# EAGLE board 1.1 (EAGLE 9.7.0), part 1 of 2
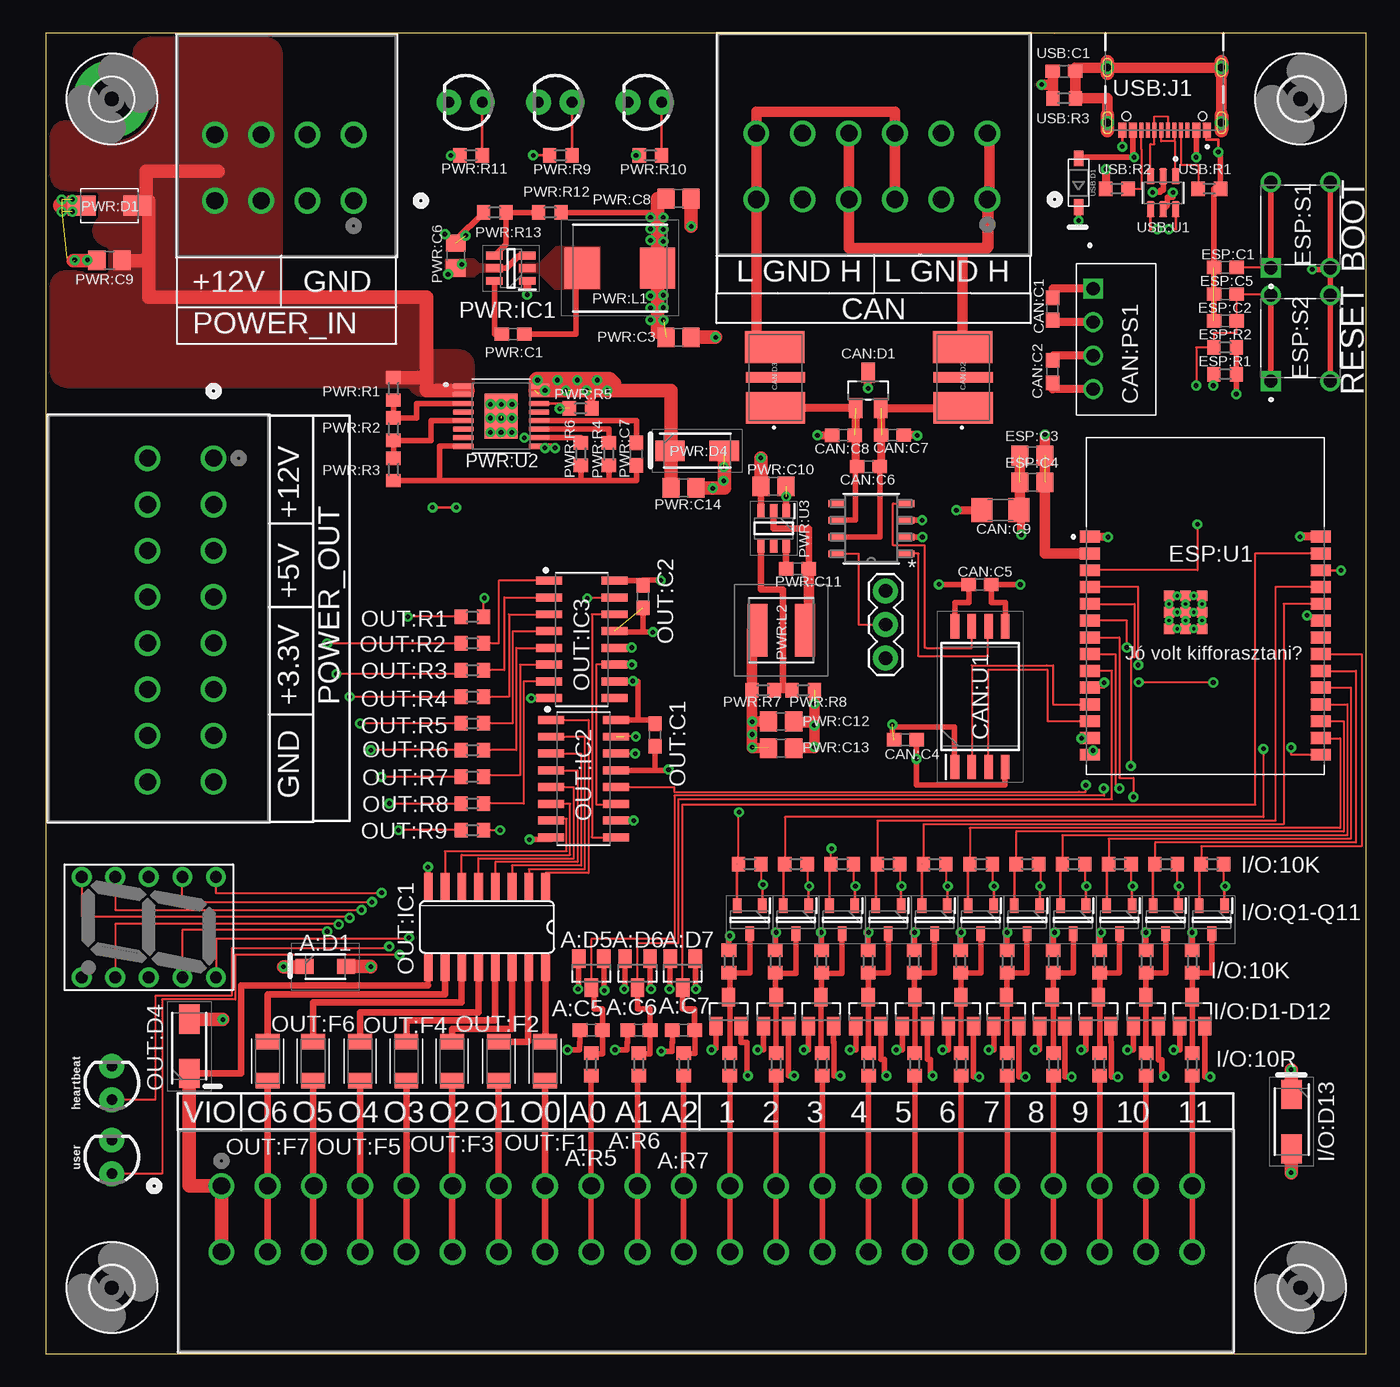
[diagram p0: board, top side]
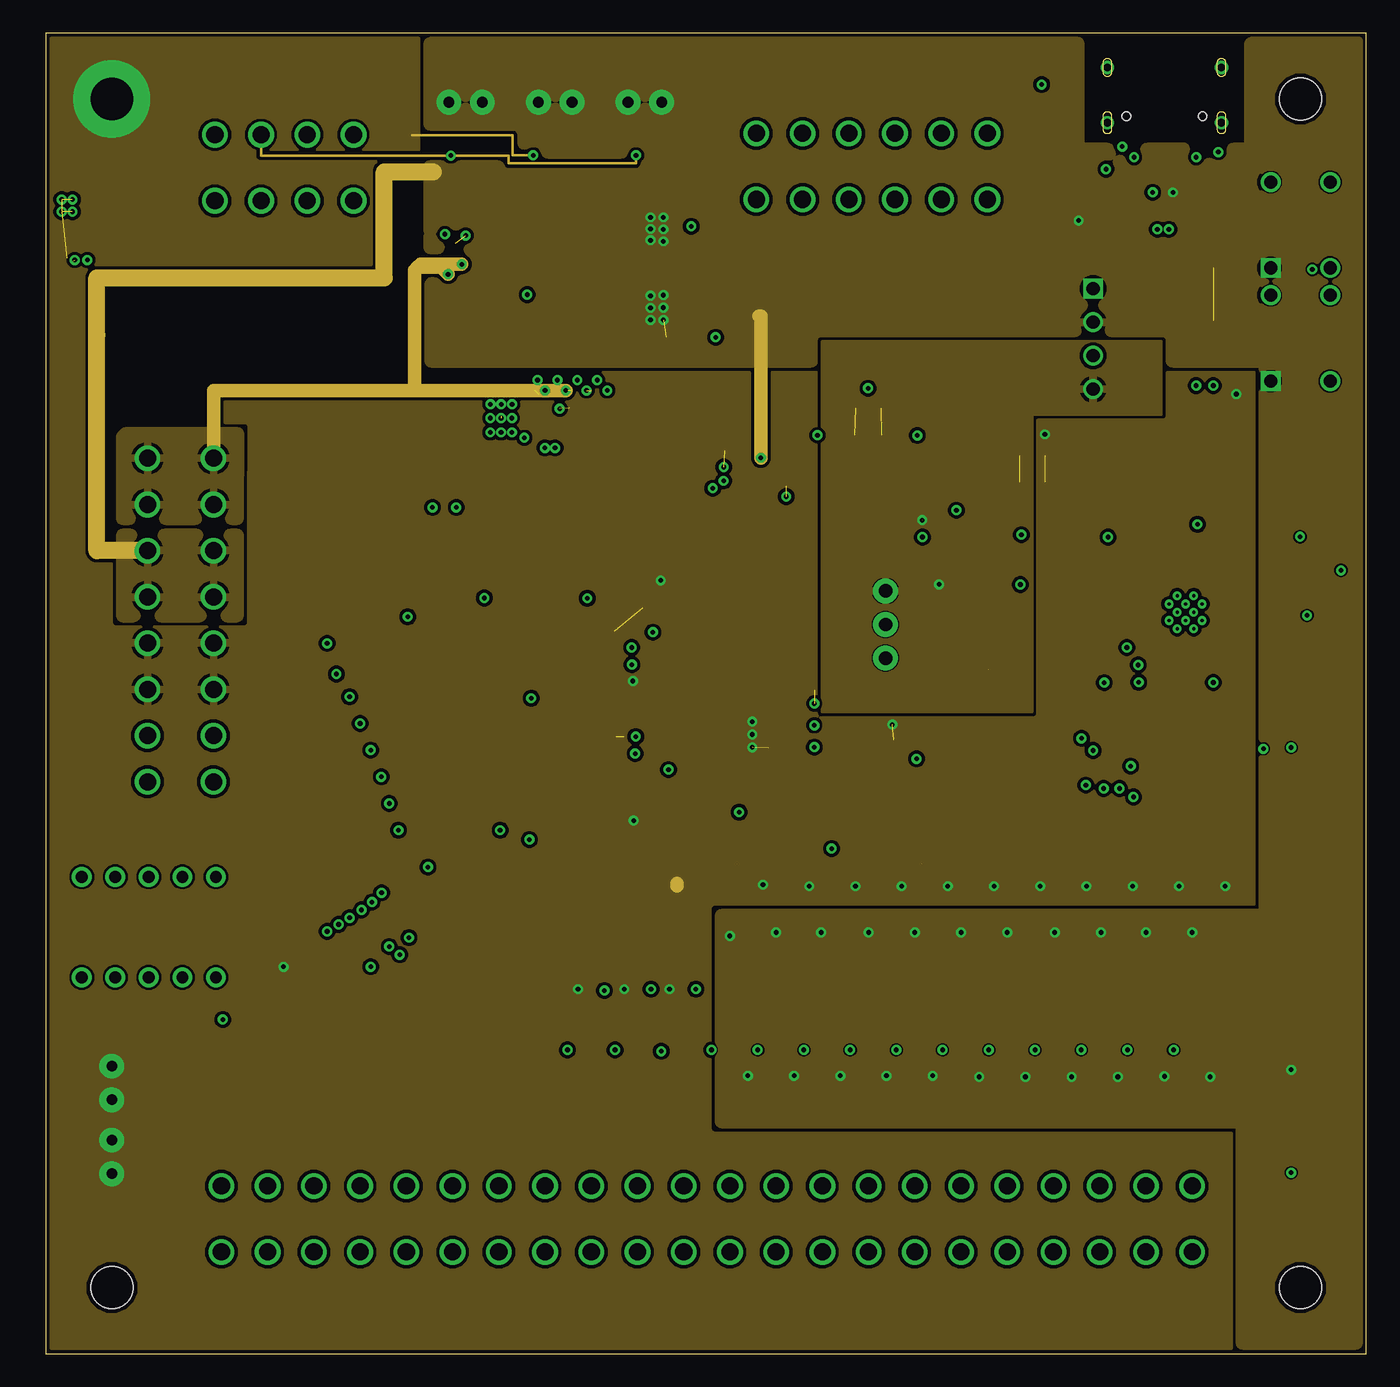
[diagram p1: board, inner layer Route2]
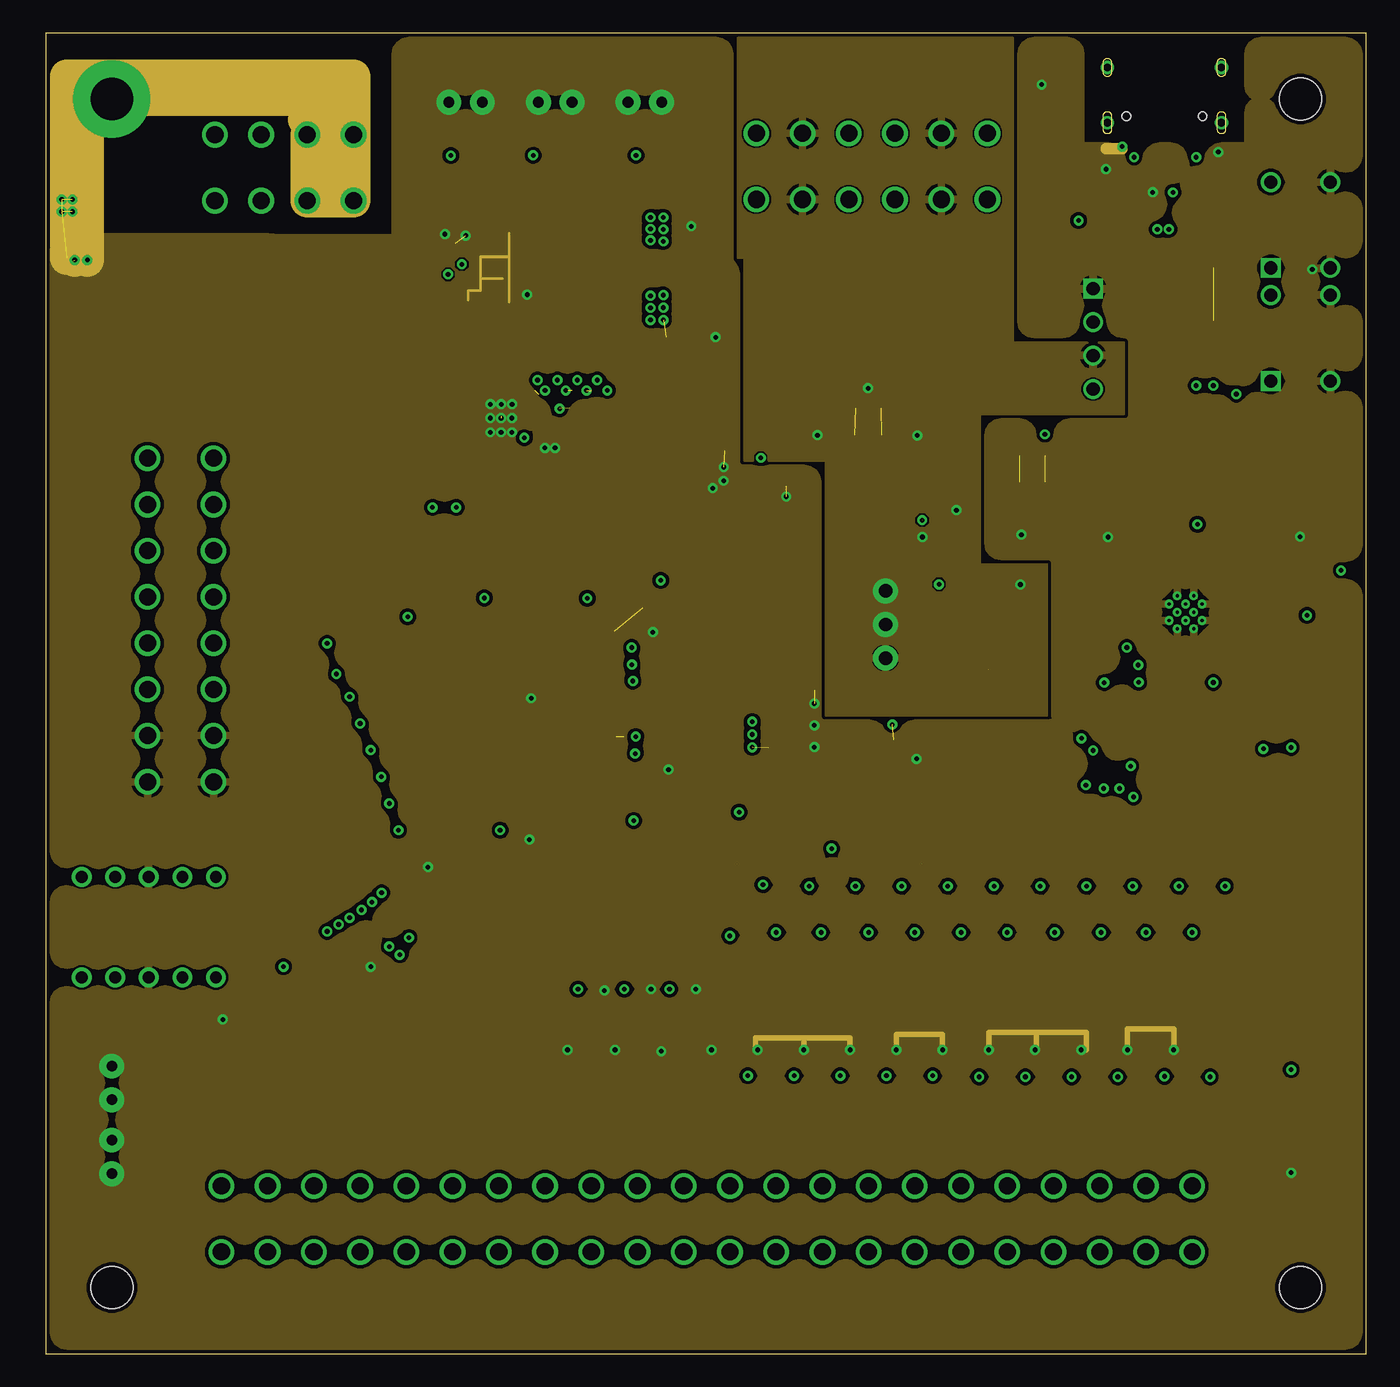
[diagram p2: board, inner layer Route15]
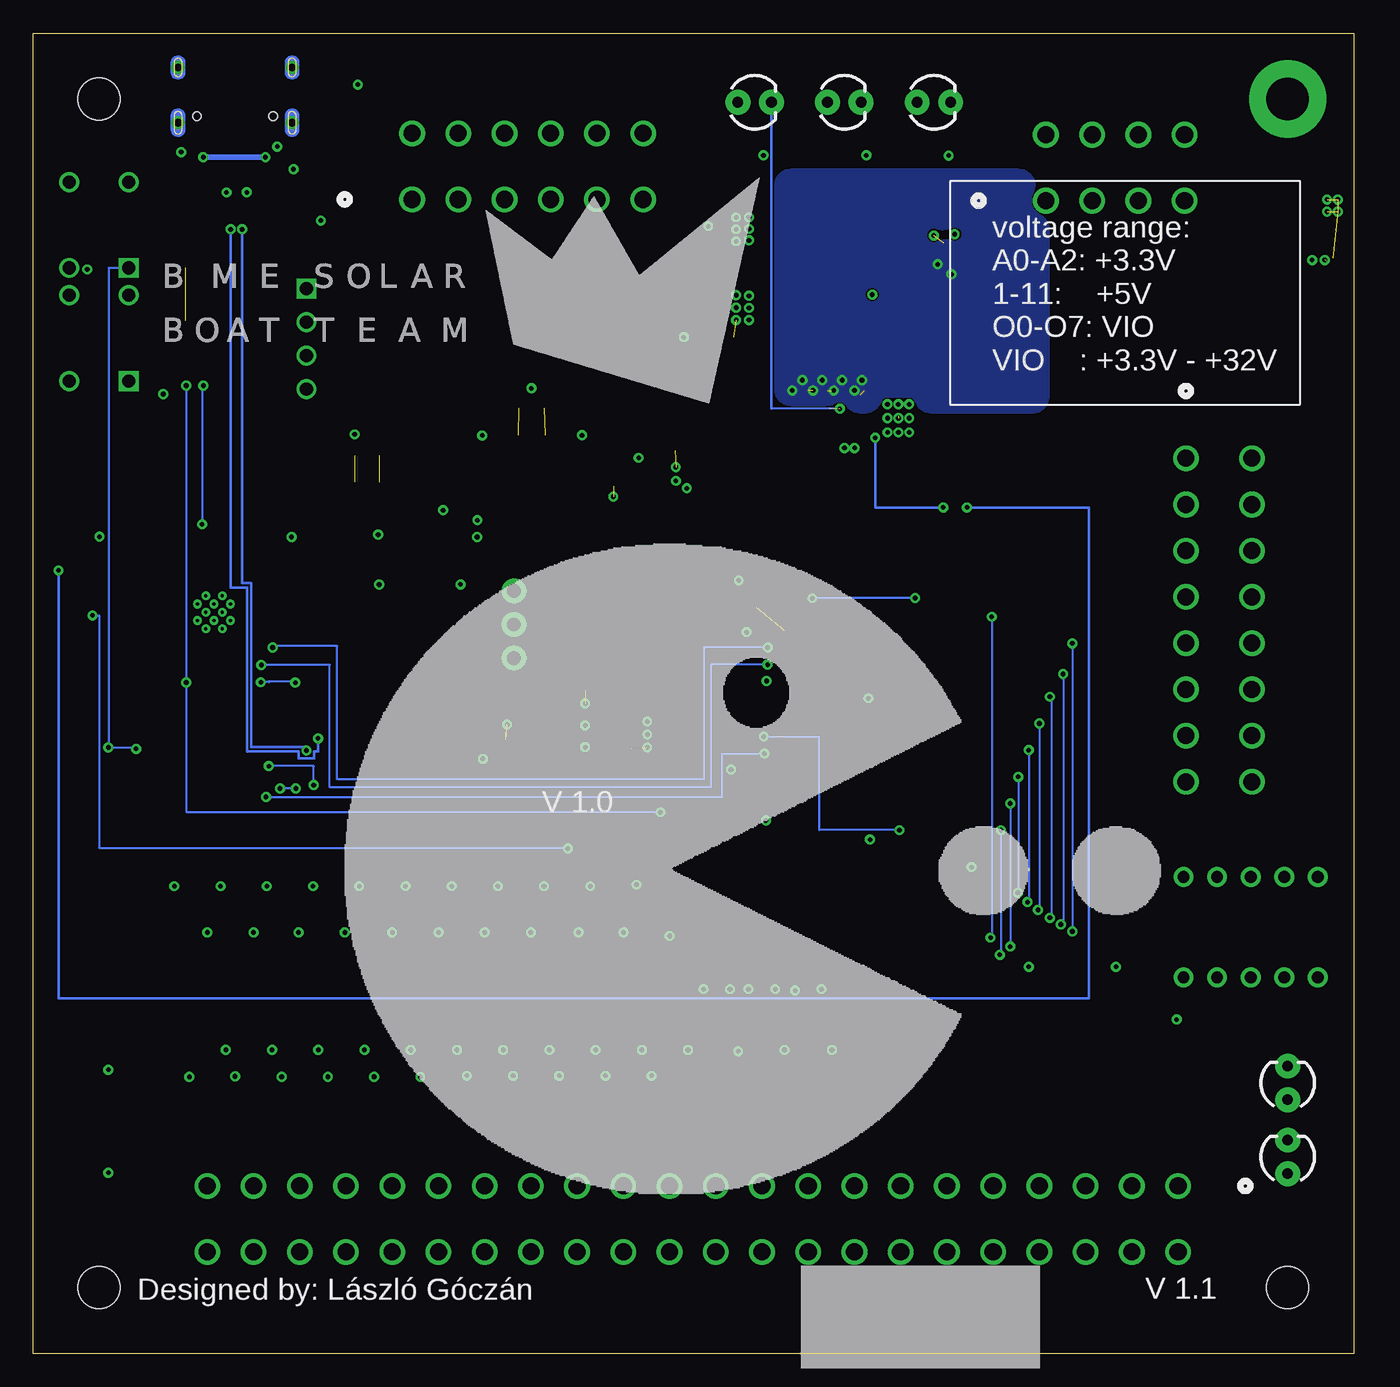
[diagram p3: board, bottom side, seen from below]

Size 100 x 100 mm. Coordinates in mm from the lower left corner, seen from the top.
Outline: 0,0 100,0 100,100 0,100 0,0
Copper layers (1+2*15+16): Top / Route2 / Route15 / Bottom
Stack-up Default Layer Stack: Top User Defined 0.035mm / Dielectric-2 User Defined 0.138mm / Route2 User Defined 0.035mm / Dielectric-1 User Defined 1.13mm / Route15 User Defined 0.035mm / Dielectric-3 User Defined 0.138mm / Bottom User Defined 0.035mm
Design rules: minimum copper width 0.125mm, minimum drill size 0.1mm, copper clearance wire_polygon to wire_polygon 0.125mm, copper clearance wire_polygon to pad_smd 0.125mm, copper clearance wire_polygon to via 0.125mm, copper clearance pad_smd to pad_smd 0.125mm, copper clearance pad_smd to via 0.125mm, copper clearance via to via 0.125mm, copper clearance smd to pad (same net) 0mil, copper clearance smd to via (same net) 0mil, copper clearance smd to smd (same net) 0mil, dimension clearance 0.3mm, restrict clearance 0mil, drill distance 0.3mm, keepout clearance 0mil

## Footprints (pad centres in the part's own frame; a part is rotated, then mirrored left to right if it is on the bottom)
C0603 = smd 1.1 x 1: 1 -0.85,0; 2 0.85,0
SOD3718X108N = smd 1.375 x 1.15: 1 -1.575,0; 2 1.575,0
SOT23 = smd 1 x 1.4: 1 -0.95,-1.1; 2 0.95,-1.1; 3 0,1.1
R0603 = smd 1 x 1.1: 1 -0.85,0; 2 0.85,0
C1206 = smd 1.6 x 1.8: 1 -1.4,0; 2 1.4,0
SOT23' = smd 1.016 x 1.524: 1 -0.95,-1.354; 2 0.95,-1.354; 3 0,1.354
DIOC650X400X100N = smd 2.4 x 4.5: 1 -2.3,0; 3 2.3,0.05 | smd 0.8 x 4.5: 2 0,0
1X03 = drill 1.016 pad 1.88: 1 0,0; 2 2.54,0; 3 5.08,0
CONV_RFM-0505S = drill 1 square: 1 -3.85,-1.75 | drill 1: 2 -1.31,-1.75; 3 1.23,-1.75; 4 3.77,-1.75
SOIC127P1150X280-8N = smd 1.85 x 0.65: 1 -5.325,1.905; 2 -5.325,0.635; 3 -5.325,-0.635; 4 -5.325,-1.905; 5 5.325,-1.905; 6 5.325,-0.635; 7 5.325,0.635; 8 5.325,1.905
D8_TEX-L = smd 1.257 x 0.508: 1 -2.623,1.905; 2 -2.623,0.635; 3 -2.623,-0.635; 4 -2.623,-1.905; 5 2.623,-1.905; 6 2.623,-0.635; 7 2.623,0.635; 8 2.623,1.905
CONN_2601-1114_WAG = drill 1.295 pad 1.803: 1_1 0,0; 1_2 0,-5; 2_1 3.5,0; 2_2 3.5,-5; 3_1 7,0; 3_2 7,-5; 4_1 10.5,0; 4_2 10.5,-5; 5_1 14,0; 5_2 14,-5; 6_1 17.5,0; 6_2 17.5,-5; 7_1 21,0; 7_2 21,-5; 8_1 24.5,0; 8_2 24.5,-5; 9_1 28,0; 9_2 28,-5; 10_1 31.5,0; 10_2 31.5,-5; 11_1 35,0; 11_2 35,-5; 12_1 38.5,0; 12_2 38.5,-5; 13_1 42,0; 13_2 42,-5; 14_1 45.5,0; 14_2 45.5,-5; 15_1 49,0; 15_2 49,-5; 16_1 52.5,0; 16_2 52.5,-5; 17_1 56,0; 17_2 56,-5; 18_1 59.5,0; 18_2 59.5,-5; 19_1 63,0; 19_2 63,-5; 20_1 66.5,0; 20_2 66.5,-5; 21_1 70,0; 21_2 70,-5; 22_1 73.5,0; 22_2 73.5,-5
CONN_2601-1108_WAG = drill 1.295 pad 1.803: 1_1 0,0; 1_2 0,-5; 2_1 3.5,0; 2_2 3.5,-5; 3_1 7,0; 3_2 7,-5; 4_1 10.5,0; 4_2 10.5,-5; 5_1 14,0; 5_2 14,-5; 6_1 17.5,0; 6_2 17.5,-5; 7_1 21,0; 7_2 21,-5; 8_1 24.5,0; 8_2 24.5,-5
CONN_2601-1106_WAG = drill 1.295 pad 1.803: 1_1 0,0; 1_2 0,-5; 2_1 3.5,0; 2_2 3.5,-5; 3_1 7,0; 3_2 7,-5; 4_1 10.5,0; 4_2 10.5,-5; 5_1 14,0; 5_2 14,-5; 6_1 17.5,0; 6_2 17.5,-5
CONN_2601-1104_WAG = drill 1.295 pad 1.803: 1_1 0,0; 1_2 0,-5; 2_1 3.5,0; 2_2 3.5,-5; 3_1 7,0; 3_2 7,-5; 4_1 10.5,0; 4_2 10.5,-5
C0805 = smd 1.3 x 1.5: 1 -0.95,0; 2 0.95,0
SW_TS02-66-70-BK-260-SCR-D = drill 1 square: 1 -3.25,2.25 | drill 1: 2 3.25,2.25; 3 -3.25,-2.25; 4 3.25,-2.25
XCVR_ESP32-C6-WROOM-1-N8 = smd 1.5 x 0.9: 1 -8.75,5.26; 2 -8.75,3.99; 3 -8.75,2.72; 4 -8.75,1.45; 5 -8.75,0.18; 6 -8.75,-1.09; 7 -8.75,-2.36; 8 -8.75,-3.63; 9 -8.75,-4.9; 10 -8.75,-6.17; 11 -8.75,-7.44; 12 -8.75,-8.71; 13 -8.75,-9.98; 14 -8.75,-11.25; 15 8.75,-11.25; 16 8.75,-9.98; 17 8.75,-8.71; 18 8.75,-7.44; 19 8.75,-6.17; 20 8.75,-4.9; 21 8.75,-3.63; 22 8.75,-2.36; 23 8.75,-1.09; 24 8.75,0.18; 25 8.75,1.45; 26 8.75,2.72; 27 8.75,3.99; 28 8.75,5.26 | smd 0.8 x 0.8: 29_1 -2.755,0.79; 29_2 -1.505,0.79; 29_3 -0.255,0.79; 29_4 -2.755,-0.46; 29_5 -1.505,-0.46; 29_6 -0.255,-0.46; 29_7 -2.755,-1.71; 29_8 -1.505,-1.71; 29_9 -0.255,-1.71 | drill 0.25 pad 0.35: 30_1 -2.13,0.79; 30_2 -0.88,0.79; 30_3 -2.755,0.165; 30_4 -1.505,0.165; 30_5 -0.255,0.165; 30_6 -2.13,-0.46; 30_7 -0.88,-0.46; 30_8 -2.755,-1.085; 30_9 -1.505,-1.085; 30_10 -0.255,-1.085; 30_11 -2.13,-1.71; 30_12 -0.88,-1.71
3,2-PAD = drill 3.2 pad 5.842: B3,2 0,0
DIOM5026X229N = smd 2.2 x 1.55: 1 -2.05,0; 2 2.05,0
SOT96P240X100-3N = smd 1.1 x 0.65: 1 -1.05,0.96; 2 -1.05,-0.96; 3 1.05,0
LED_3MM = drill 0.813 pad 1.88: A -1.27,0; K 1.27,0
FUSC3215X82N = smd 1.165 x 1.814: 1 -1.475,0; 2 1.475,0
SO16 = smd 0.66 x 2.032: 1 -4.445,-3.073; 2 -3.175,-3.073; 3 -1.905,-3.073; 4 -0.635,-3.073; 5 0.635,-3.073; 6 1.905,-3.073; 7 3.175,-3.073; 8 4.445,-3.073; 9 4.445,3.073; 10 3.175,3.073; 11 1.905,3.073; 12 0.635,3.073; 13 -0.635,3.073; 14 -1.905,3.073; 15 -3.175,3.073; 16 -4.445,3.073
SOIC127P600X175-16N = smd 1.969 x 0.602: 1 -2.474,4.445; 2 -2.474,3.175; 3 -2.474,1.905; 4 -2.474,0.635; 5 -2.474,-0.635; 6 -2.474,-1.905; 7 -2.474,-3.175; 8 -2.474,-4.445; 9 2.474,-4.445; 10 2.474,-3.175; 11 2.474,-1.905; 12 2.474,-0.635; 13 2.474,0.635; 14 2.474,1.905; 15 2.474,3.175; 16 2.474,4.445
S4301B = drill 0.9 pad 1.5: 1 -3.81,5.08; 2 -3.81,2.54; 3 -3.81,0; 4 -3.81,-2.54; 5 -3.81,-5.08; 6 3.81,-5.08; 7 3.81,-2.54; 8 3.81,0; 9 3.81,2.54; 10 3.81,5.08
DIOM4325X250N = smd 2.12 x 1.5: 1 -2.115,0; 2 2.115,0
SOT95P280X110-6N = smd 1.25 x 0.6: 1 -1.25,0.95; 2 -1.25,0; 3 -1.25,-0.95; 4 1.25,-0.95; 5 1.25,0; 6 1.25,0.95
INDPM7166X300N = smd 2.65 x 3.1: 1 -2.85,0; 2 2.85,0
NRS5040T100MMGJV = smd 1.5 x 4: 1 -1.8,0; 2 1.8,0
SOP65P640X120-17N = smd 1.57 x 0.41: 1 -2.87,2.275; 2 -2.87,1.625; 3 -2.87,0.975; 4 -2.87,0.325; 5 -2.87,-0.325; 6 -2.87,-0.975; 7 -2.87,-1.625; 8 -2.87,-2.275; 9 2.87,-2.275; 10 2.87,-1.625; 11 2.87,-0.975; 12 2.87,-0.325; 13 2.87,0.325; 14 2.87,0.975; 15 2.87,1.625; 16 2.87,2.275 | smd 2.48 x 3.4: 17 0,0
SOT95P280X100-6N = smd 1.05 x 0.55: 1 -1.3,0.95; 2 -1.3,0; 3 -1.3,-0.95; 4 1.3,-0.95; 5 1.3,0; 6 1.3,0.95
3,2 = hole 3.2: 0,0
SOD-123 = smd 1.2 x 0.7: A 1.85,0; C -1.85,0
GCT_USB4105-GF-A = smd 0.6 x 1.15: A1_B12 -3.2,4.755; A4_B9 -2.4,4.755; B1_A12 3.2,4.755; B4_A9 2.4,4.755 | smd 0.3 x 1.15: A5 -1.25,4.755; A6 -0.25,4.755; A7 0.25,4.755; A8 1.25,4.755; B5 1.75,4.755; B6 0.75,4.755; B7 -0.75,4.755; B8 -1.75,4.755 | drill 0.6 pad 1: SH1 -4.32,4.18; SH2 4.32,4.18; SH3 -4.32,0; SH4 4.32,0 | hole 0.65: 2.89,3.68; -2.89,3.68
SOT95P280X145-6N = smd 1.21 x 0.59: 1 -1.255,0.95; 2 -1.255,0; 3 -1.255,-0.95; 4 1.255,-0.95; 5 1.255,0; 6 1.255,0.95

## Placement (x,y rotation side)
A:C5  10n  [C0603]  41.3,24.5 180 top
A:C6  10n  [C0603]  44.9,24.5 180 top
A:C7  10n  [C0603]  48.3,24.5 180 top
A:D1  SMF3.3  [SOD3718X108N]  21.16,29.32 0 top
A:D5  BAS40-04  [SOT23]  41.3,28.8 180 top
A:D6  BAS40-04  [SOT23]  44.8,28.8 180 top
A:D7  BAS40-04  [SOT23]  48.23,28.8 180 top
A:R5  100R  [R0603]  41.3,21.9 270 top
A:R6  100R  [R0603]  44.9,21.9 270 top
A:R7  100R  [R0603]  48.3,21.9 270 top
CAN:C1  1u  [C0603]  76.23,79.11 90 top
CAN:C2  1u  [C0603]  76.23,74.36 90 top
CAN:C4  100n  [C0603]  65.08,46.48 0 top
CAN:C5  100n  [C0603]  70.74,58.24 0 top
CAN:C6  47p  [C0603]  62.3,67.16 180 top
CAN:C7  47p  [C0603]  64.12,69.55 0 top
CAN:C8  47p  [C0603]  60.38,69.54 0 top
CAN:C9  100n 2kv  [C1206]  72.28,63.88 0 top
CAN:D1  NUP2105L  [SOT23']  62.27,72.94 0 top
CAN:D2  TBU-CA065-200-WH  [DIOC650X400X100N]  69.46,73.91 90 top
CAN:D3  TBU-CA065-200-WH  [DIOC650X400X100N]  55.25,73.91 90 top
CAN:JP1  JUMPER-3PTH  [1X03]  63.58,52.67 90 top
CAN:PS1  RFM-0505S  [CONV_RFM-0505S]  81.05,76.8 270 top
CAN:U1  ISO6721FQDWVRQ1  [SOIC127P1150X280-8N]  70.74,49.75 90 top
CAN:U2  TCAN1051HGDD8_TEX-L  [D8_TEX-L]  62.5,62.47 180 top
CON:J1  2601-1122  [CONN_2601-1114_WAG]  13.3,12.7 0 top
CON:J2  2601-1108CONN_2601-1108_WAG  [CONN_2601-1108_WAG]  12.7,67.8 270 top
CON:J3  2601-1106CONN_2601-1106_WAG  [CONN_2601-1106_WAG]  71.3,87.4 180 top
CON:J4  2601-1104CONN_2601-1104_WAG  [CONN_2601-1104_WAG]  23.3,87.3 180 top
ESP:C1  0.1u  [C0603]  89.3,82.25 0 top
ESP:C2  1u  [C0603]  89.3,78.21 180 top
ESP:C3  10u  [C0805]  74.7,68 180 top
ESP:C4  10u  [C0805]  74.7,65.98 180 top
ESP:C5  0.1u  [C0603]  89.3,80.23 0 top
ESP:R1  3.3K  [R0603]  89.3,74.17 180 top
ESP:R2  10K  [R0603]  89.3,76.19 0 top
ESP:S1  TS02-66-70-BK-260-SCR-D  [SW_TS02-66-70-BK-260-SCR-D]  95,85.46 90 top
ESP:S2  TS02-66-70-BK-260-SCR-D  [SW_TS02-66-70-BK-260-SCR-D]  95,76.89 90 top
ESP:U1  ESP32-C6-WROOM-1-N8  [XCVR_ESP32-C6-WROOM-1-N8]  87.8,56.6 0 top
H1  MOUNT-PAD-ROUND3.2  [3,2-PAD]  5,95 0 top
I/O:D1  BAS40-04  [SOT23]  51.7,25.9 0 top
I/O:D2  BAS40-04  [SOT23]  55.3,25.9 0 top
I/O:D3  BAS40-04  [SOT23]  58.7,25.9 0 top
I/O:D4  BAS40-04  [SOT23]  62.27,25.9 0 top
I/O:D6  BAS40-04  [SOT23]  65.8,25.9 0 top
I/O:D7  BAS40-04  [SOT23]  69.3,25.9 0 top
I/O:D8  BAS40-04  [SOT23]  72.72,25.9 0 top
I/O:D9  BAS40-04  [SOT23]  76.2,25.9 0 top
I/O:D10  BAS40-04  [SOT23]  79.7,25.9 0 top
I/O:D11  BAS40-04  [SOT23]  83.3,25.9 0 top
I/O:D12  BAS40-04  [SOT23]  86.8,25.9 0 top
I/O:D13  SMAJ5.0A  [DIOM5026X229N]  94.34,17.57 270 top
I/O:Q1  2N7002K-7  [SOT96P240X100-3N]  53.3,32.86 270 top
I/O:Q2  2N7002K-7  [SOT96P240X100-3N]  56.8,32.86 270 top
I/O:Q3  2N7002K-7  [SOT96P240X100-3N]  60.3,32.86 270 top
I/O:Q4  2N7002K-7  [SOT96P240X100-3N]  63.8,32.86 270 top
I/O:Q5  2N7002K-7  [SOT96P240X100-3N]  67.3,32.86 270 top
I/O:Q6  2N7002K-7  [SOT96P240X100-3N]  70.8,32.86 270 top
I/O:Q7  2N7002K-7  [SOT96P240X100-3N]  74.29,32.86 270 top
I/O:Q8  2N7002K-7  [SOT96P240X100-3N]  77.79,32.86 270 top
I/O:Q9  2N7002K-7  [SOT96P240X100-3N]  81.29,32.86 270 top
I/O:Q10  2N7002K-7  [SOT96P240X100-3N]  84.79,32.86 270 top
I/O:Q11  2N7002K-7  [SOT96P240X100-3N]  88.29,32.86 270 top
I/O:R1  10K  [R0603]  53.3,37.07 0 top
I/O:R2  10K  [R0603]  51.73,29.7 90 top
I/O:R3  10R  [R0603]  51.8,21.9 270 top
I/O:R4  10K  [R0603]  56.8,37.07 0 top
I/O:R5  10K  [R0603]  55.24,29.7 90 top
I/O:R6  10R  [R0603]  55.3,21.9 270 top
I/O:R7  10K  [R0603]  60.31,37.07 0 top
I/O:R8  10K  [R0603]  58.75,29.7 90 top
I/O:R9  10R  [R0603]  58.8,21.9 270 top
I/O:R10  10K  [R0603]  63.81,37.07 0 top
I/O:R11  10K  [R0603]  62.25,29.7 90 top
I/O:R12  10R  [R0603]  62.3,21.9 270 top
I/O:R16  10K  [R0603]  67.31,37.07 0 top
I/O:R17  10K  [R0603]  65.76,29.7 90 top
I/O:R18  10R  [R0603]  65.8,21.9 270 top
I/O:R19  10K  [R0603]  70.81,37.07 0 top
I/O:R20  10K  [R0603]  69.27,29.7 90 top
I/O:R21  10R  [R0603]  69.3,21.9 270 top
I/O:R22  10K  [R0603]  74.32,37.07 0 top
I/O:R23  10K  [R0603]  72.78,29.7 90 top
I/O:R24  10R  [R0603]  72.8,21.9 270 top
I/O:R25  10K  [R0603]  77.82,37.07 0 top
I/O:R26  10K  [R0603]  76.29,29.7 90 top
I/O:R27  10R  [R0603]  76.3,21.9 270 top
I/O:R28  10K  [R0603]  81.32,37.07 0 top
I/O:R29  10K  [R0603]  79.79,29.7 90 top
I/O:R30  10R  [R0603]  79.8,21.9 270 top
I/O:R31  10K  [R0603]  84.83,37.07 0 top
I/O:R32  10K  [R0603]  83.3,29.7 90 top
I/O:R33  10R  [R0603]  83.3,21.9 270 top
I/O:R34  10K  [R0603]  88.33,37.07 0 top
I/O:R35  10K  [R0603]  86.81,29.7 90 top
I/O:R36  10R  [R0603]  86.8,21.9 270 top
OUT:C1  100n  [C0603]  46.13,46.85 270 top
OUT:C2  100n  [C0603]  45.21,57.33 270 top
OUT:D1  heartbeat  [LED_3MM]  5,20.5 90 top
OUT:D2  user  [LED_3MM]  5,14.9 90 top
OUT:D4  SMAJ30A  [DIOM5026X229N]  10.86,23.28 90 top
OUT:F1  500mA  [FUSC3215X82N]  37.8,22.15 270 top
OUT:F2  500mA  [FUSC3215X82N]  34.3,22.15 270 top
OUT:F3  500mA  [FUSC3215X82N]  30.76,22.15 270 top
OUT:F4  500mA  [FUSC3215X82N]  27.3,22.15 270 top
OUT:F5  500mA  [FUSC3215X82N]  23.8,22.15 270 top
OUT:F6  500mA  [FUSC3215X82N]  20.24,22.15 270 top
OUT:F7  500mA  [FUSC3215X82N]  16.8,22.15 270 top
OUT:IC1  ULN2003AD  [SO16]  33.4,32.3 180 top
OUT:IC2  74HC595_SOIC  [SOIC127P600X175-16N]  40.72,43.54 0 top
OUT:IC3  74HC595_SOIC  [SOIC127P600X175-16N]  40.58,54.08 0 top
OUT:LED1  S4301B  [S4301B]  7.8,32.3 270 top
OUT:R1  330R  [R0603]  32.3,55.8 180 top
OUT:R2  330R  [R0603]  32.3,53.78 180 top
OUT:R3  330R  [R0603]  32.3,51.76 180 top
OUT:R4  330R  [R0603]  32.3,49.74 180 top
OUT:R5  330R  [R0603]  32.3,47.72 180 top
OUT:R6  330R  [R0603]  32.3,45.7 180 top
OUT:R7  330R  [R0603]  32.3,43.68 180 top
OUT:R8  330R  [R0603]  32.3,41.66 180 top
OUT:R9  330R  [R0603]  32.3,39.64 180 top
PWR:C1  0.1u  [C0603]  35.38,77.2 0 top
PWR:C3  22u  [C0805]  47.91,76.96 0 top
PWR:C6  2.2u  [C0805]  31.04,83.15 90 top
PWR:C7  0.1u  [C0603]  44.71,68.12 270 top
PWR:C8  22u  [C0805]  47.91,87.46 0 top
PWR:C9  0.22u 60v  [C0805]  4.82,82.78 180 top
PWR:C10  10u  [C0805]  55.09,65.68 0 top
PWR:C11  100n  [C0603]  56.92,59.43 0 top
PWR:C12  22u  [C0805]  55.68,47.87 0 top
PWR:C13  22u  [C0805]  55.68,45.85 0 top
PWR:C14  0.22u  [C0805]  48.29,65.56 0 top
PWR:D1  SMAJ58CA  [DIOM4325X250N]  4.82,86.93 0 top
PWR:D2  nominal  [LED_3MM]  38.57,94.75 180 top
PWR:D3  fault  [LED_3MM]  45.36,94.75 180 top
PWR:D4  SMAJ30A  [DIOM5026X229N]  49.32,68.38 0 top
PWR:D5  power  [LED_3MM]  31.78,94.75 180 top
PWR:IC1  LMR51430YDDCR  [SOT95P280X110-6N]  35.22,82.18 180 top
PWR:L1  PA4341.682ANLT  [INDPM7166X300N]  43.47,82.2 0 top
PWR:L2  NRS5040T2R2NMGJ  [NRS5040T100MMGJV]  55.68,54.77 180 top
PWR:R1  681K  [R0603]  26.32,73.06 90 top
PWR:R2  60.4K  [R0603]  26.32,70.01 90 top
PWR:R3  30.1K  [R0603]  26.32,66.95 90 top
PWR:R4  5.36K  [R0603]  42.63,68.12 90 top
PWR:R5  100k  [R0603]  40.49,71.58 0 top
PWR:R6  17.4K  [R0603]  40.52,68.12 270 top
PWR:R7  31.6K  [R0603]  54.31,50.23 180 top
PWR:R8  10K  [R0603]  57.35,50.23 180 top
PWR:R9  330R  [R0603]  38.99,90.74 0 top
PWR:R10  2K  [R0603]  45.78,90.73 0 top
PWR:R11  2K  [R0603]  32.2,90.74 0 top
PWR:R12  100K  [R0603]  38.17,86.42 0 top
PWR:R13  13.7K  [R0603]  33.99,86.42 0 top
PWR:U2  TPS26600PWPR  [SOP65P640X120-17N]  34.48,70.98 0 top
PWR:U3  AP62250WU-7  [SOT95P280X100-6N]  55.11,62.49 270 top
U$1  [3,2]  95,5 0 top
U$2  [3,2]  5,5 0 top
U$4  [3,2]  95,95 0 top
USB:C1  1n  [C0603]  77.1,97.1 180 top
USB:D1  40V  [SOD-123]  78.2,88.65 90 top
USB:J1  USB4105-GF-A  [GCT_USB4105-GF-A]  84.7,97.39 180 top
USB:R1  5.1K  [R0603]  88.1,88.21 180 top
USB:R2  5.1K  [R0603]  81.1,88.21 180 top
USB:R3  100k  [R0603]  77.1,95.06 0 top
USB:U1  USBLC6-2SC6  [SOT95P280X145-6N]  84.6,87.9 270 top

## Library data of the parts
A:C5-A:C7 A:R5-A:R7 CAN:C1 CAN:C2 CAN:C4-CAN:C9 ESP:C1-ESP:C5 ESP:R1 ESP:R2 I/O:R1-I/O:R12 I/O:R16-I/O:R36 OUT:C1 OUT:C2 OUT:R1-OUT:R9 PWR:C1 PWR:C3 PWR:C6-PWR:C14 PWR:R1-PWR:R13 USB:C1 USB:R1-USB:R3 = resistor
A:D1 = SMF3.3; DESCRIPTION: ESD Suppressors / TVS Diodes 200W 3.3V 5% Uni-directional; HEIGHT: 1.08mm; MANUFACTURER_NAME: LITTELFUSE; MANUFACTURER_PART_NUMBER: SMF3.3; MOUSER_PART_NUMBER: 576-SMF3.3; MOUSER_PRICE-STOCK: https://www.mouser.co.uk/ProductDetail/Littelfuse/SMF3.3?qs=5LChGqRbrjutbyo%2F8EojOg%3D%3D
A:D5-A:D7 I/O:D1-I/O:D4 I/O:D6-I/O:D12 = diode
CAN:D1 = NUP2105L; AVAILABILITY: In Stock; CHECK_PRICES: https://www.snapeda.com/parts/NUP2105L/Diotec/view-part/?ref=eda; DESCRIPTION: ESD, SOT-23, 0.1A, 24V, Unidir; MF: Diotec Semiconductor; MP: NUP2105L; PACKAGE: SOT-23-3 Diotec; PRICE: None; PURCHASE-URL: https://www.snapeda.com/api/url_track_click_mouser/?unipart_id=5164164&manufacturer=Diotec Semiconductor&part_name=NUP2105L&search_term=nup2105l; SNAPEDA_LINK: https://www.snapeda.com/parts/NUP2105L/Diotec/view-part/?ref=snap
CAN:D2 CAN:D3 = TBU-CA065-200-WH; AVAILABILITY: In Stock; CHECK_PRICES: https://www.snapeda.com/parts/TBU-CA065-200-WH/Bourns+-+J.W.+Miller/view-part/?ref=eda; DESCRIPTION: A Single Bi-Directional, 650V, 200mA, 3-Pin DFN pkg TBU | Bourns TBU-CA065-200-WH; MF: Bourns; MP: TBU-CA065-200-WH; PACKAGE: SMD-4 Bourns; PRICE: None; PURCHASE-URL: https://www.snapeda.com/api/url_track_click_mouser/?unipart_id=587286&manufacturer=Bourns&part_name=TBU-CA065-200-WH&search_term=tbu-ca065-200-wh; SNAPEDA_LINK: https://www.snapeda.com/parts/TBU-CA065-200-WH/Bourns+-+J.W.+Miller/view-part/?ref=snap
CAN:JP1 = SparkFun-Retired
CAN:PS1 = RFM-0505S; AVAILABILITY: In Stock; CHECK_PRICES: https://www.snapeda.com/parts/RFM-0505S/Recom+Power/view-part/?ref=eda; DESCRIPTION: DC-DC Converter, SIP4, 1kV unreg, Single Output, 1W, 5V Out, RFM Series | RECOM Power Inc. RFM-0505S; MF: Recom Power; MP: RFM-0505S; PACKAGE: SIP-4 Recom Power; PRICE: None; PURCHASE-URL: https://www.snapeda.com/api/url_track_click_mouser/?unipart_id=2771046&manufacturer=Recom Power&part_name=RFM-0505S&search_term=rfm-0505s; SNAPEDA_LINK: https://www.snapeda.com/parts/RFM-0505S/Recom+Power/view-part/?ref=snap
CAN:U1 = ISO6721FQDWVRQ1; DESCRIPTION: Digital Isolators Automotive, general-purpose, dual-channel, 1/1 digital isolator; HEIGHT: 2.8mm; MANUFACTURER_NAME: Texas Instruments; MANUFACTURER_PART_NUMBER: ISO6721FQDWVRQ1; MOUSER_PART_NUMBER: 595-ISO6721FQDWVRQ1; MOUSER_PRICE-STOCK: https://www.mouser.co.uk/ProductDetail/Texas-Instruments/ISO6721FQDWVRQ1?qs=TuK3vfAjtkVdnWQ4lceCiA%3D%3D
CAN:U2 = 2024-02-16_18-01-42_Library; COPYRIGHT: Copyright (C) 2024 Ultra Librarian. All rights reserved.; MANUFACTURER_PART_NUMBER: TCAN1051HGD; MFR_NAME: Texas Instruments
CON:J1 = 2601-1122
CON:J2 = 2601-1108; COPYRIGHT: Copyright (C) 2024 Ultra Librarian. All rights reserved.; MANUFACTURER_PART_NUMBER: 2601-1108; MFR_NAME: Wago
CON:J3 = 2601-1106; COPYRIGHT: Copyright (C) 2024 Ultra Librarian. All rights reserved.; MANUFACTURER_PART_NUMBER: 2601-1106; MFR_NAME: Wago
CON:J4 = 2601-1104; COPYRIGHT: Copyright (C) 2024 Ultra Librarian. All rights reserved.; MANUFACTURER_PART_NUMBER: 2601-1104; MFR_NAME: Wago
ESP:S1 ESP:S2 = TS02-66-70-BK-260-SCR-D; AVAILABILITY: In Stock; CHECK_PRICES: https://www.snapeda.com/parts/TS02-66-70-BK-260-SCR-D/CUI+Devices/view-part/?ref=eda; CUI_PURCHASE_URL: https://www.cuidevices.com/product/switches/tactile-switches/ts02-66-70-bk-260-scr-d?utm_source=snapeda.com&utm_medium=referral&utm_campaign=snapedaBOM; DESCRIPTION: 6 x 6 mm, 7 mm Actuator Height, 260 gf, Black, Short Crimped, Through Hole, SPST, Tactile Switch; MF: CUI Devices; MP: TS02-66-70-BK-260-SCR-D; PACKAGE: None; PRICE: None; PURCHASE-URL: https://www.snapeda.com/api/url_track_click_mouser/?unipart_id=8666189&manufacturer=CUI Devices&part_name=TS02-66-70-BK-260-SCR-D&search_term=ts02-66; SNAPEDA_LINK: https://www.snapeda.com/parts/TS02-66-70-BK-260-SCR-D/CUI+Devices/view-part/?ref=snap
ESP:U1 = ESP32-FIXED; AVAILABILITY: In Stock; CHECK_PRICES: https://www.snapeda.com/parts/ESP32-C6-WROOM-1-N8/Espressif+Systems/view-part/?ref=eda; DESCRIPTION: Multiprotocol Modules ESP32-C6 module, Wi-Fi 6 in 2.4 GHz band, Bluetooth 5, Zigbee 3.0 and Thread. ESP34-WROOM Compatible - ENGINEERING SAMPLE; MF: Espressif Systems; MP: ESP32-C6-WROOM-1-N8; PACKAGE: None; PRICE: None; PURCHASE-URL: https://www.snapeda.com/api/url_track_click_mouser/?unipart_id=12616380&manufacturer=Espressif Systems&part_name=ESP32-C6-WROOM-1-N8&search_term=esp32 c6 wroom; SNAPEDA_LINK: https://www.snapeda.com/parts/ESP32-C6-WROOM-1-N8/Espressif+Systems/view-part/?ref=snap
H1 U$1 U$2 U$4 = holes
I/O:D13 = SMAJ5.0A; DESCRIPTION: Littelfuse SMAJ5.0A, Uni-Directional TVS Diode, 400W, 2-Pin DO-214AC; HEIGHT: 2.29mm; MANUFACTURER_NAME: LITTELFUSE; MANUFACTURER_PART_NUMBER: SMAJ5.0A; MOUSER_PART_NUMBER: 576-SMAJ5.0A; MOUSER_PRICE-STOCK: https://www.mouser.co.uk/ProductDetail/Littelfuse/SMAJ5.0A?qs=2VFNtWizgicfetZVA4gWHA%3D%3D
I/O:Q1-I/O:Q11 = 2N7002K-7; ARROW_PART_NUMBER: 2N7002K-7; ARROW_PRICE-STOCK: https://www.arrow.com/en/products/2n7002k-7/diodes-incorporated?region=nac; DESCRIPTION: N-CHANNEL ENHANCEMENT MODE MOSFET; HEIGHT: 1mm; MANUFACTURER_NAME: Diodes Incorporated; MANUFACTURER_PART_NUMBER: 2N7002K-7
OUT:D1 OUT:D2 PWR:D2 PWR:D3 PWR:D5 = SparkFun-LED; PROD_ID: DIO-08794
OUT:D4 PWR:D4 = SMAJ30A; DESCRIPTION: ESD Suppressors / TVS Diodes 400W 30V 5% Uni-Directional; HEIGHT: 2.29mm; MANUFACTURER_NAME: LITTELFUSE; MANUFACTURER_PART_NUMBER: SMAJ30A; MOUSER_PART_NUMBER: 576-SMAJ30A; MOUSER_PRICE-STOCK: https://www.mouser.co.uk/ProductDetail/Littelfuse/SMAJ30A?qs=JJML70Qc14tOmIOtllb78g%3D%3D
OUT:F1-OUT:F7 = Circuit-Protection; CATEGORY: Circuit-Protection; SUB-CATEGORY: Fuse
OUT:IC1 = uln-udn
OUT:IC2 OUT:IC3 = IC_Logic; CATEGORY: IC_Logic; DESCRIPTION: 8-Bit Shift Registers; MANUFACTURER: Generic; MPN: Generic; SUB-CATEGORY: Shift Register; TYPE: 8-Bit
OUT:LED1 = led-7-segment; OC_FARNELL: unknown; OC_NEWARK: unknown
PWR:D1 = SMAJ58CA; AVAILABILITY: In Stock; CHECK_PRICES: https://www.snapeda.com/parts/SMAJ58CA/Taiwan+Semiconductor/view-part/?ref=eda; DESCRIPTION: 400W, 67.8V, 5%, Bidirectional, TVS; MF: Taiwan Semiconductor; MP: SMAJ58CA; PACKAGE: SMA Taiwan Semiconductor; PRICE: None; SNAPEDA_LINK: https://www.snapeda.com/parts/SMAJ58CA/Taiwan+Semiconductor/view-part/?ref=snap
PWR:IC1 = LMR51430YDDCR; DESCRIPTION: Switching Voltage Regulators SIMPLE SWITCHER&reg; 4.5-V to 36-V, 3-A synchronous buck converter with 40-&micro;A IQ; HEIGHT: 1.1mm; MANUFACTURER_NAME: Texas Instruments; MANUFACTURER_PART_NUMBER: LMR51430YDDCR; MOUSER_PART_NUMBER: 595-LMR51430YDDCR; MOUSER_PRICE-STOCK: https://www.mouser.co.uk/ProductDetail/Texas-Instruments/LMR51430YDDCR?qs=vvQtp7zwQdMdLcsY5sFiMg%3D%3D
PWR:L1 = PA4341.682ANLT; DESCRIPTION: Fixed Inductors 6.8uH 4.5A 3mm 20% SMT; HEIGHT: 3mm; MANUFACTURER_NAME: Pulse Electronics; MANUFACTURER_PART_NUMBER: PA4341.682ANLT; MOUSER_PART_NUMBER: 673-PA4341.682ANLT; MOUSER_PRICE-STOCK: https://www.mouser.co.uk/ProductDetail/Pulse-Electronics/PA4341682ANLT?qs=chTDxNqvsylFNe219EfDtQ%3D%3D
PWR:L2 = NRS5040T2R2NMGJ; DESCRIPTION: Taiyo Yuden INDUCTOR,LOW PROFILE WOUND,2.2UH 30% ,T&R; HEIGHT: 4.1mm; MANUFACTURER_NAME: TAIYO YUDEN; MANUFACTURER_PART_NUMBER: NRS5040T2R2NMGJ; MOUSER_PART_NUMBER: 963-NRS5040T2R2NMGJ; MOUSER_PRICE-STOCK: https://www.mouser.co.uk/ProductDetail/Taiyo-Yuden/NRS5040T2R2NMGJ?qs=y6ZabgHbY%252BxyGl8JeadOAA%3D%3D
PWR:U2 = Library; AVAILABILITY: In Stock; CHECK_PRICES: https://www.snapeda.com/parts/TPS26600PWPR/Texas+Instruments/view-part/?ref=eda; DESCRIPTION: 4.2-V to 60-V, 150m&Omega;, 0.1-2.23A eFuse with integrated input reverse polarity protection; MF: Texas Instruments; MP: TPS26600PWPR; PACKAGE: HTSSOP-16 Texas Instruments; PRICE: None; PURCHASE-URL: https://www.snapeda.com/api/url_track_click_mouser/?unipart_id=885900&manufacturer=Texas Instruments&part_name=TPS26600PWPR&search_term=tps26600; SNAPEDA_LINK: https://www.snapeda.com/parts/TPS26600PWPR/Texas+Instruments/view-part/?ref=snap
PWR:U3 = AP62250WU-7; DESCRIPTION: DCDC CONV HV BUCK TSOT26 T&R 3K; HEIGHT: 1mm; MANUFACTURER_NAME: Diodes Incorporated; MANUFACTURER_PART_NUMBER: AP62250WU-7; MOUSER_PART_NUMBER: 621-AP62250WU-7; MOUSER_PRICE-STOCK: https://www.mouser.co.uk/ProductDetail/Diodes-Incorporated/AP62250WU-7?qs=7MVldsJ5Uax1PUc8sdeimQ%3D%3D
USB:D1 = Tubescreamer
USB:J1 = USB4105-GF-A; AVAILABILITY: In Stock; CHECK_PRICES: https://www.snapeda.com/parts/USB4105-GF-A/Global+Connector+Technology/view-part/?ref=eda; DESCRIPTION: USB-C (USB TYPE-C) USB 2.0 Receptacle Connector 24 (16+8 Dummy) Position Surface Mount, Right Angle; Through Hole; MF: GCT; MP: USB4105-GF-A; PACKAGE: None; PRICE: None; PURCHASE-URL: https://www.snapeda.com/api/url_track_click_mouser/?unipart_id=4423780&manufacturer=GCT&part_name=USB4105-GF-A&search_term=usb4105-gf-a; SNAPEDA_LINK: https://www.snapeda.com/parts/USB4105-GF-A/Global+Connector+Technology/view-part/?ref=snap
USB:U1 = USBLC6-2SC6; AVAILABILITY: In Stock; CHECK_PRICES: https://www.snapeda.com/parts/USBLC6-2SC6/STMicroelectronics/view-part/?ref=eda; DESCRIPTION: 17V Clamp 5A (8/20µs) Ipp Tvs Diode Surface Mount SOT-23-6; MF: STMicroelectronics; MP: USBLC6-2SC6; PACKAGE: SOT-23-6 STMicroelectronics; PRICE: None; PURCHASE-URL: https://www.snapeda.com/api/url_track_click_mouser/?unipart_id=231887&manufacturer=STMicroelectronics&part_name=USBLC6-2SC6&search_term=usblc6-2sc6; SNAPEDA_LINK: https://www.snapeda.com/parts/USBLC6-2SC6/STMicroelectronics/view-part/?ref=snap

## Nets
3V3: A:D1.1 A:D5.2 A:D6.2 A:D7.2 CAN:C4.1 CAN:U1.1 CON:J2.5_1 CON:J2.5_2 CON:J2.6_1 CON:J2.6_2 ESP:C3.1 ESP:C4.1 ESP:R1.1 ESP:R2.2 ESP:U1.2 I/O:Q1.1 I/O:Q2.1 I/O:Q3.1 I/O:Q4.1 I/O:Q5.1 I/O:Q6.1 I/O:Q7.1 I/O:Q8.1 I/O:Q9.1 I/O:Q10.1 I/O:Q11.1 I/O:R1.2 I/O:R4.2 I/O:R7.2 I/O:R10.2 I/O:R16.2 I/O:R19.2 I/O:R22.2 I/O:R25.2 I/O:R28.2 I/O:R31.2 I/O:R34.2 OUT:C1.1 OUT:C2.1 OUT:IC2.10 OUT:IC2.16 OUT:IC3.10 OUT:IC3.16 PWR:C12.1 PWR:C13.1 PWR:L2.2 PWR:R7.2 PWR:R9.1
5V0: CAN:C1.1 CAN:PS1.2 CON:J2.3_1 CON:J2.3_2 CON:J2.4_1 CON:J2.4_2 I/O:D1.2 I/O:D2.2 I/O:D3.2 I/O:D4.2 I/O:D6.2 I/O:D7.2 I/O:D8.2 I/O:D9.2 I/O:D10.2 I/O:D11.2 I/O:D12.2 I/O:D13.1 I/O:R2.2 I/O:R5.2 I/O:R8.2 I/O:R11.2 I/O:R17.2 I/O:R20.2 I/O:R23.2 I/O:R26.2 I/O:R29.2 I/O:R32.2 I/O:R35.2 PWR:C3.1 PWR:C8.1 PWR:C10.1 PWR:L1.2 PWR:R12.2 PWR:U3.3 USB:D1.C USB:U1.5
12V: CON:J4.3_1 CON:J4.3_2 CON:J4.4_1 CON:J4.4_2 PWR:C9.1 PWR:D1.2 PWR:R1.2 PWR:R10.1 PWR:R11.1 PWR:U2.1 PWR:U2.2
12V_FUSED: CON:J2.1_1 CON:J2.1_2 CON:J2.2_1 CON:J2.2_2 PWR:C6.1 PWR:C14.1 PWR:D4.1 PWR:IC1.3 PWR:IC1.5 PWR:R5.2 PWR:U2.15 PWR:U2.16
CAN:5V0_CAN: CAN:C2.1 CAN:C5.1 CAN:JP1.3 CAN:PS1.4 CAN:U1.8 CAN:U2.3
CAN:CANH: CAN:C6.1 CAN:C7.1 CAN:D1.2 CAN:D2.1 CAN:U2.7
CAN:CANL: CAN:C6.2 CAN:C8.2 CAN:D1.1 CAN:D3.1 CAN:U2.6
CAN:N$1: CAN:JP1.2 CAN:U2.8
CAN:RX_CAN: CAN:U1.7 CAN:U2.4
CAN:TX_CAN: CAN:U1.6 CAN:U2.1
ESP:EN: ESP:C2.1 ESP:C5.2 ESP:R2.1 ESP:S2.1 ESP:S2.2 ESP:U1.3
GND: A:C5.2 A:C6.2 A:C7.2 A:D1.2 A:D5.1 A:D6.1 A:D7.1 CAN:C1.2 CAN:C4.2 CAN:C9.2 CAN:PS1.1 CAN:U1.4 CON:J2.7_1 CON:J2.7_2 CON:J2.8_1 CON:J2.8_2 CON:J4.1_1 CON:J4.1_2 CON:J4.2_1 CON:J4.2_2 ESP:C1.1 ESP:C2.2 ESP:C3.2 ESP:C4.2 ESP:C5.1 ESP:S1.3 ESP:S1.4 ESP:S2.3 ESP:S2.4 ESP:U1.1 ESP:U1.28 ESP:U1.29_1 ESP:U1.29_2 ESP:U1.29_3 ESP:U1.29_4 ESP:U1.29_5 ESP:U1.29_6 ESP:U1.29_7 ESP:U1.29_8 ESP:U1.29_9 ESP:U1.30_1 ESP:U1.30_2 ESP:U1.30_3 ESP:U1.30_4 ESP:U1.30_5 ESP:U1.30_6 ESP:U1.30_7 ESP:U1.30_8 ESP:U1.30_9 ESP:U1.30_10 ESP:U1.30_11 ESP:U1.30_12 H1.B3,2 I/O:D1.1 I/O:D2.1 I/O:D3.1 I/O:D4.1 I/O:D6.1 I/O:D7.1 I/O:D8.1 I/O:D9.1 I/O:D10.1 I/O:D11.1 I/O:D12.1 I/O:D13.2 OUT:C1.2 OUT:C2.2 OUT:D1.K OUT:D2.K OUT:D4.2 OUT:IC1.8 OUT:IC2.8 OUT:IC2.13 OUT:IC3.8 OUT:IC3.13 OUT:LED1.3 OUT:LED1.8 PWR:C3.2 PWR:C6.2 PWR:C8.2 PWR:C9.2 PWR:C10.2 PWR:C12.2 PWR:C13.2 PWR:C14.2 PWR:D1.1 PWR:D2.K PWR:D4.2 PWR:D5.K PWR:IC1.1 PWR:R8.1 PWR:R13.1 PWR:U2.9 PWR:U2.17 PWR:U3.1 USB:C1.2 USB:J1.A1_B12 USB:J1.B1_A12 USB:R1.1 USB:R2.2 USB:R3.1 USB:U1.2
GND_CAN: CAN:C2.2 CAN:C5.2 CAN:C7.2 CAN:C8.1 CAN:C9.1 CAN:D1.3 CAN:JP1.1 CAN:PS1.3 CAN:U1.5 CAN:U2.2 CON:J3.2_1 CON:J3.2_2 CON:J3.5_1 CON:J3.5_2
I/O:N$1: I/O:D1.3 I/O:Q1.3 I/O:R2.1 I/O:R3.1
I/O:N$2: I/O:D2.3 I/O:Q2.3 I/O:R5.1 I/O:R6.1
I/O:N$3: I/O:D3.3 I/O:Q3.3 I/O:R8.1 I/O:R9.1
I/O:N$4: I/O:D4.3 I/O:Q4.3 I/O:R11.1 I/O:R12.1
I/O:N$5: I/O:D6.3 I/O:Q5.3 I/O:R17.1 I/O:R18.1
I/O:N$6: I/O:D7.3 I/O:Q6.3 I/O:R20.1 I/O:R21.1
I/O:N$7: I/O:D8.3 I/O:Q7.3 I/O:R23.1 I/O:R24.1
I/O:N$8: I/O:D9.3 I/O:Q8.3 I/O:R26.1 I/O:R27.1
I/O:N$9: I/O:D10.3 I/O:Q9.3 I/O:R29.1 I/O:R30.1
I/O:N$10: I/O:D11.3 I/O:Q10.3 I/O:R32.1 I/O:R33.1
I/O:N$11: I/O:D12.3 I/O:Q11.3 I/O:R35.1 I/O:R36.1
N$1: ESP:U1.4 OUT:IC2.11 OUT:IC3.11
N$2: ESP:U1.5 OUT:IC2.12
N$3: ESP:U1.6 OUT:IC3.12
N$4: ESP:U1.7 OUT:IC2.14
N$5: ESP:U1.26 PWR:R6.1 PWR:U2.10
N$6: CAN:D2.3 CON:J3.1_1 CON:J3.1_2 CON:J3.4_1 CON:J3.4_2
N$9: CAN:D3.3 CON:J3.3_1 CON:J3.3_2 CON:J3.6_1 CON:J3.6_2
N$10: ESP:R1.2 ESP:U1.10 I/O:Q1.2 I/O:R1.1
N$11: ESP:C1.2 ESP:S1.1 ESP:S1.2 ESP:U1.15 I/O:Q2.2 I/O:R4.1
N$13: CON:J1.1_1 CON:J1.1_2 OUT:D4.1 OUT:IC1.9
N$14: A:C5.1 A:D5.3 A:R5.1 ESP:U1.8
N$15: A:C6.1 A:D6.3 A:R6.1 ESP:U1.9
N$17: A:C7.1 A:D7.3 A:R7.1 ESP:U1.27
N$18: CON:J1.8_1 CON:J1.8_2 OUT:F1.2
N$19: CON:J1.7_1 CON:J1.7_2 OUT:F2.2
N$20: CON:J1.6_1 CON:J1.6_2 OUT:F3.2
N$21: CON:J1.5_1 CON:J1.5_2 OUT:F4.2
N$22: CON:J1.4_1 CON:J1.4_2 OUT:F5.2
N$23: CON:J1.3_1 CON:J1.3_2 OUT:F6.2
N$24: CON:J1.2_1 CON:J1.2_2 OUT:F7.2
N$25: A:R5.2 CON:J1.9_1 CON:J1.9_2
N$26: A:R6.2 CON:J1.10_1 CON:J1.10_2
N$27: A:R7.2 CON:J1.11_1 CON:J1.11_2
N$28: ESP:U1.23 I/O:Q3.2 I/O:R7.1
N$29: ESP:U1.25 I/O:Q4.2 I/O:R10.1
N$30: ESP:U1.24 I/O:Q5.2 I/O:R16.1
N$31: ESP:U1.16 I/O:Q6.2 I/O:R19.1
N$32: ESP:U1.17 I/O:Q7.2 I/O:R22.1
N$33: ESP:U1.18 I/O:Q8.2 I/O:R25.1
N$34: ESP:U1.19 I/O:Q9.2 I/O:R28.1
N$35: ESP:U1.20 I/O:Q10.2 I/O:R31.1
N$36: ESP:U1.21 I/O:Q11.2 I/O:R34.1
N$37: CON:J1.12_1 CON:J1.12_2 I/O:R3.2
N$38: CON:J1.13_1 CON:J1.13_2 I/O:R6.2
N$39: CON:J1.14_1 CON:J1.14_2 I/O:R9.2
N$40: CON:J1.15_1 CON:J1.15_2 I/O:R12.2
N$41: CON:J1.16_1 CON:J1.16_2 I/O:R18.2
N$42: CON:J1.17_1 CON:J1.17_2 I/O:R21.2
N$43: CON:J1.18_1 CON:J1.18_2 I/O:R24.2
N$44: CON:J1.19_1 CON:J1.19_2 I/O:R27.2
N$45: CON:J1.20_1 CON:J1.20_2 I/O:R30.2
N$46: CON:J1.21_1 CON:J1.21_2 I/O:R33.2
N$47: CON:J1.22_1 CON:J1.22_2 I/O:R36.2
N$48: CAN:U1.2 ESP:U1.11
N$49: CAN:U1.3 ESP:U1.12
OUT:N$1: OUT:F1.1 OUT:IC1.16
OUT:N$2: OUT:F2.1 OUT:IC1.15
OUT:N$3: OUT:F3.1 OUT:IC1.14
OUT:N$4: OUT:F4.1 OUT:IC1.13
OUT:N$5: OUT:F5.1 OUT:IC1.12
OUT:N$6: OUT:F6.1 OUT:IC1.11
OUT:N$7: OUT:F7.1 OUT:IC1.10
OUT:N$8: OUT:IC1.1 OUT:IC2.1
OUT:N$9: OUT:IC1.2 OUT:IC2.2
OUT:N$10: OUT:IC1.3 OUT:IC2.3
OUT:N$11: OUT:IC1.4 OUT:IC2.4
OUT:N$12: OUT:IC1.5 OUT:IC2.5
OUT:N$13: OUT:IC1.6 OUT:IC2.6
OUT:N$14: OUT:IC1.7 OUT:IC2.7
OUT:N$15: OUT:IC3.15 OUT:R1.1
OUT:N$16: OUT:LED1.10 OUT:R1.2
OUT:N$17: OUT:IC3.1 OUT:R2.1
OUT:N$18: OUT:LED1.9 OUT:R2.2
OUT:N$19: OUT:IC3.2 OUT:R3.1
OUT:N$20: OUT:LED1.7 OUT:R3.2
OUT:N$21: OUT:IC3.3 OUT:R4.1
OUT:N$22: OUT:LED1.5 OUT:R4.2
OUT:N$23: OUT:IC3.4 OUT:R5.1
OUT:N$24: OUT:LED1.4 OUT:R5.2
OUT:N$25: OUT:IC3.5 OUT:R6.1
OUT:N$26: OUT:LED1.2 OUT:R6.2
OUT:N$27: OUT:IC3.6 OUT:R7.1
OUT:N$28: OUT:LED1.1 OUT:R7.2
OUT:N$29: OUT:IC3.7 OUT:R8.1
OUT:N$30: OUT:D1.A OUT:R8.2
OUT:N$31: OUT:IC2.15 OUT:R9.1
OUT:N$32: OUT:IC2.9 OUT:IC3.14
OUT:N$33: OUT:D2.A OUT:R9.2
PWR:3V1: PWR:D3.K PWR:R5.1 PWR:U2.14
PWR:N$1: PWR:C1.2 PWR:IC1.2 PWR:L1.1
PWR:N$2: PWR:C1.1 PWR:IC1.6
PWR:N$3: PWR:IC1.4 PWR:R12.1 PWR:R13.2
PWR:N$4: PWR:C11.1 PWR:U3.6
PWR:N$5: PWR:D3.A PWR:R10.2
PWR:N$6: PWR:D5.A PWR:R11.2
PWR:N$8: PWR:C7.2 PWR:R3.1 PWR:R4.1 PWR:R6.2 PWR:U2.8
PWR:N$9: PWR:C7.1 PWR:U2.12
PWR:N$10: PWR:R4.2 PWR:U2.11
PWR:N$11: PWR:R7.1 PWR:R8.2 PWR:U3.4
PWR:N$35: PWR:D2.A PWR:R9.2
PWR:OVP: PWR:R2.1 PWR:R3.2 PWR:U2.5
PWR:SW: PWR:C11.2 PWR:L2.1 PWR:U3.2
PWR:UVLO: PWR:R1.1 PWR:R2.2 PWR:U2.3
USB:N$1: USB:J1.A5 USB:R1.2
USB:N$2: USB:J1.B5 USB:R2.1
USB:N$3: USB:J1.A6 USB:J1.B6 USB:U1.3
USB:N$4: USB:J1.A7 USB:J1.B7 USB:U1.1
USB:N$5: USB:D1.A USB:J1.A4_B9 USB:J1.B4_A9
USB:N$6: USB:C1.1 USB:J1.SH1 USB:J1.SH2 USB:J1.SH3 USB:J1.SH4 USB:R3.2
USB_N: ESP:U1.13 USB:U1.6
USB_P: ESP:U1.14 USB:U1.4